# Altium PCB AC_board.PcbDoc (part 3 of 3)
Units mil, origin at the board's own origin, x right, y up, seen from the top; angles counter-clockwise.
Board outline 5905.51 x 3937.01 mil, 4 copper layers (Top Layer, Layer 1, Layer 2, Bottom Layer), stack 31.891 mil thick; 28 components, 29 nets, 132 pads, 3623 vias.
Unrouted connection lines stored in the file: 10.
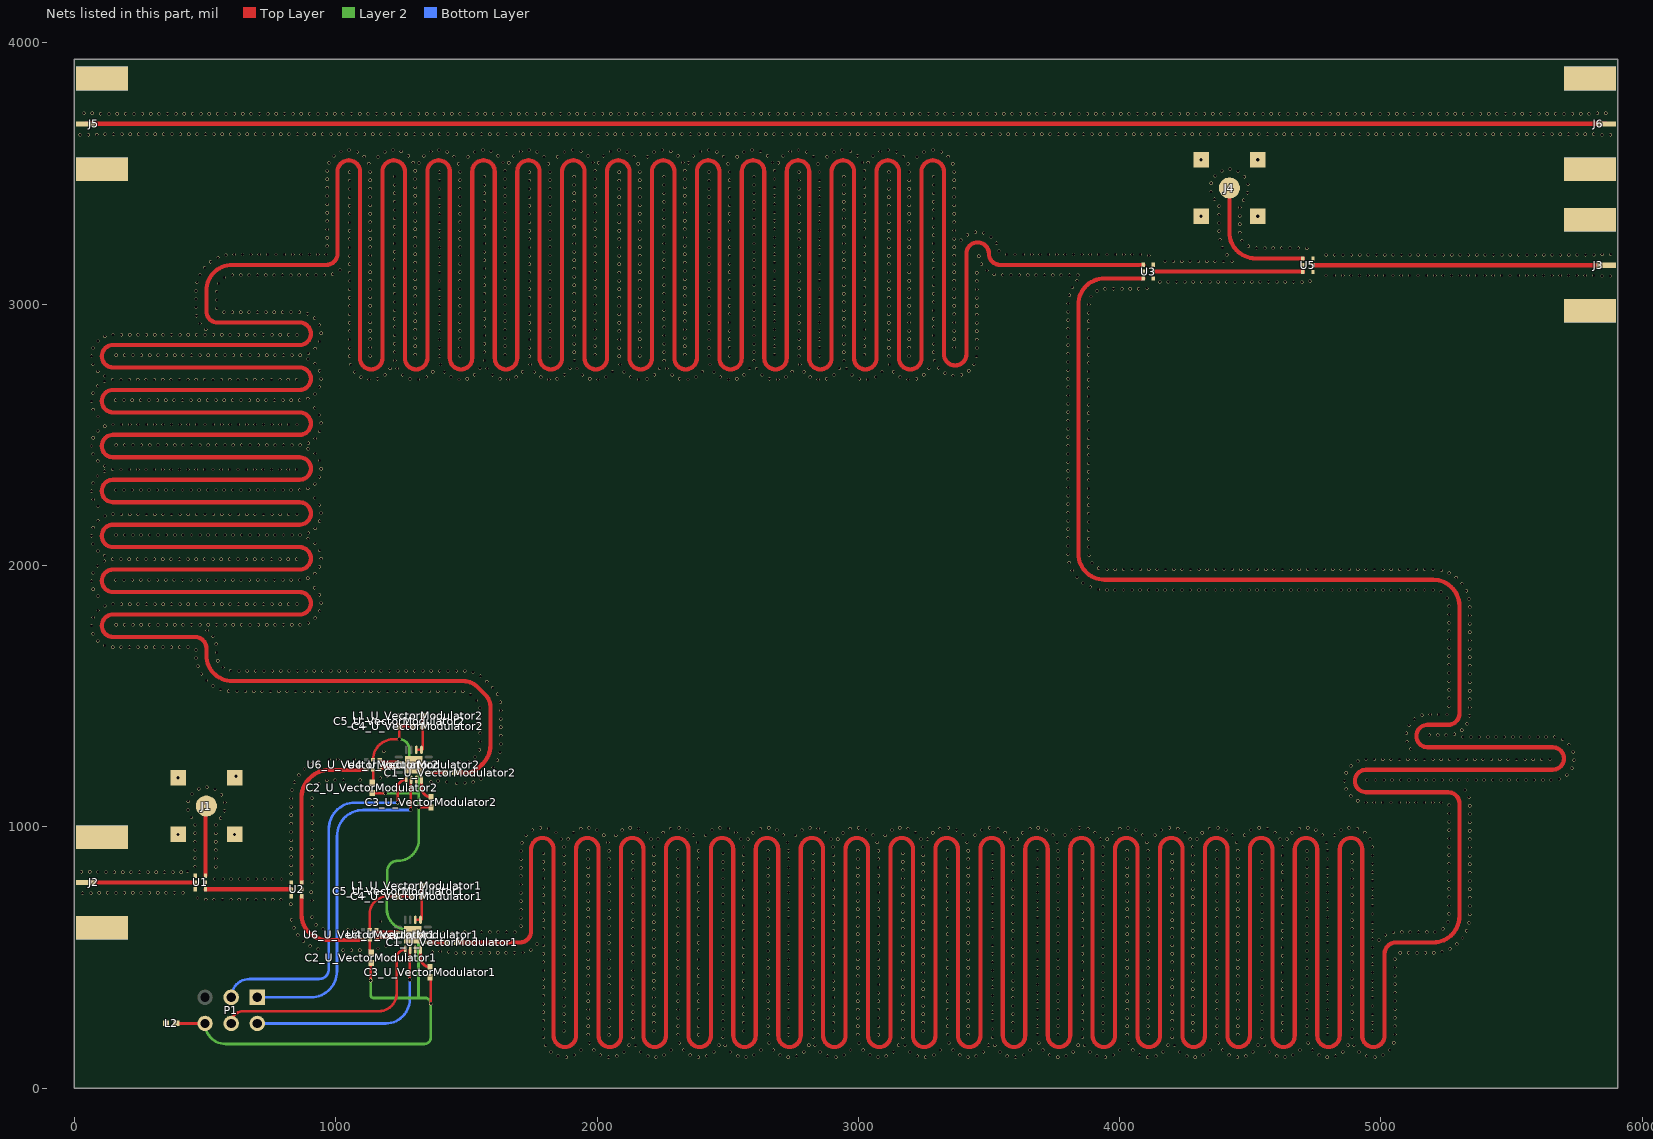
[diagram p5: the nets of this part, all layers, seen from the top]

## Via types
v1: diameter 12, hole 10, Top Layer to Bottom Layer, 3602 vias
v2: diameter 14, hole 12, Top Layer to Bottom Layer, 11 vias
v3: diameter 15, hole 12, Top Layer to Bottom Layer, 10 vias

## Nets (pads, with @x,y where several pads share a name; then routed paths per layer and width w, separated by ;. In a path a pad name is that pad's centre, name@x,y a point inside that pad or via, vN(x,y) a via of type N, cw(c..) or ccw(c..) an arc to the next point about the centre after c; other vN are vias at no path point) (continued)
AGND: (continued)
  other v1: 1277.98,3568.36 1337,3567.81 1621.73,3568.4 1680.82,3567.84 1965.48,3568.44 2024.66,3567.89 2309.22,3568.49 2368.49,3567.93 2712.33,3567.98 3056.18,3568.03 2652.97,3568.54 2996.71,3568.59 1083,3583.3 1187.99,3582.99 1426.83,3583.28 1531.74,3582.97 1770.67,3583.26 1875.47,3582.95 2114.52,3583.24 2219.21,3582.92 2458.37,3583.21 2562.94,3582.9 2802.22,3583.19 2906.66,3582.87 3146.08,3583.16 3250.39,3582.84 3317.78,3583.24 1020.31,3584.73 1250.67,3585.05 1364.14,3584.75 1594.41,3585.07 1707.98,3584.77 1938.15,3585.09 2051.82,3584.79 2281.88,3585.11 2395.68,3584.82 2625.61,3585.14 2739.53,3584.84 2969.34,3585.17 3083.39,3584.87 1051.8,3590.42 1219.12,3590.4 1395.64,3590.41 1562.86,3590.4 1739.48,3590.4 1906.59,3590.4 2083.33,3590.4 2250.32,3590.4 2427.19,3590.4 2594.05,3590.4 2771.04,3590.4 2937.77,3590.4 3114.91,3590.4 3286.59,3590.4 21.76,3648.73 53.76,3648.73 85.76,3649.36 5845.68,3648.73 5877.68,3648.73 117.73,3650.6 149.73,3650.6 181.73,3650.6 213.73,3650.6 245.73,3650.6 277.73,3650.6 309.73,3650.6 341.73,3650.6 373.73,3650.6 405.73,3650.6 437.73,3650.6 469.73,3650.6 501.73,3650.6 533.73,3650.6 565.73,3650.6 597.73,3650.6 629.73,3650.6 661.73,3650.6 693.73,3650.6 725.73,3650.6 757.73,3650.6 789.73,3650.6 821.73,3650.6 853.73,3650.6 885.73,3650.6 917.73,3650.6 949.73,3650.6 981.73,3650.6 1013.73,3650.6 1045.73,3650.6 1077.73,3650.6 1109.73,3650.6 1141.73,3650.6 1173.73,3650.6 1205.73,3650.6 1237.73,3650.6 1269.73,3650.6 1301.73,3650.6 1333.73,3650.6 1365.73,3650.6 1397.73,3650.6 1429.73,3650.6 1461.73,3650.6 1493.73,3650.6 1525.73,3650.6 1557.73,3650.6 1589.73,3650.6 1621.73,3650.6 1653.73,3650.6 1685.73,3650.6 1717.73,3650.6 1749.73,3650.6 1781.73,3650.6 1813.73,3650.6 1845.73,3650.6 1877.73,3650.6 1909.73,3650.6 1941.73,3650.6 1973.73,3650.6 2005.73,3650.6 2037.73,3650.6 2069.73,3650.6 2101.73,3650.6 2133.73,3650.6 2165.73,3650.6 2197.73,3650.6 2229.73,3650.6 2261.73,3650.6 2293.73,3650.6 2325.73,3650.6 2357.73,3650.6 2389.73,3650.6 2421.73,3650.6 2453.73,3650.6 2485.73,3650.6 2517.73,3650.6 2549.73,3650.6 2581.73,3650.6 2613.73,3650.6 2645.73,3650.6 2677.73,3650.6 2709.73,3650.6 2741.73,3650.6 2773.73,3650.6 2805.73,3650.6 2837.73,3650.6 2869.73,3650.6 2901.73,3650.6 2933.73,3650.6 2965.73,3650.6 2997.73,3650.6 3029.73,3650.6 3061.73,3650.6 3093.73,3650.6 3125.73,3650.6 3157.73,3650.6 3189.73,3650.6 3221.73,3650.6 3253.73,3650.6 3285.73,3650.6 3317.73,3650.6 3349.73,3650.6 3381.73,3650.6 3413.73,3650.6 3445.73,3650.6 3477.73,3650.6 3509.73,3650.6 3541.73,3650.6 3573.73,3650.6 3605.73,3650.6 3637.73,3650.6 3669.73,3650.6 3701.73,3650.6 3733.73,3650.6 3765.73,3650.6 3797.73,3650.6 3829.73,3650.6 3861.73,3650.6 3893.73,3650.6 3925.73,3650.6 3957.73,3650.6 3989.73,3650.6 4021.73,3650.6 4053.73,3650.6 4085.73,3650.6 4117.73,3650.6 4149.73,3650.6 4181.73,3650.6 4213.73,3650.6 4245.73,3650.6 4277.73,3650.6 4309.73,3650.6 4341.73,3650.6 4373.73,3650.6 4405.73,3650.6 4437.73,3650.6 4469.73,3650.6 4501.73,3650.6 4533.73,3650.6 4565.73,3650.6 4597.73,3650.6 4629.73,3650.6 4661.73,3650.6 4693.73,3650.6 4725.73,3650.6 4757.73,3650.6 4789.73,3650.6 4821.73,3650.6 4853.73,3650.6 4885.73,3650.6 4917.73,3650.6 4949.73,3650.6 4981.73,3650.6 5013.73,3650.6 5045.73,3650.6 5077.73,3650.6 5109.73,3650.6 5141.73,3650.6 5173.73,3650.6 5205.73,3650.6 5237.73,3650.6 5269.73,3650.6 5301.73,3650.6 5333.73,3650.6 5365.73,3650.6 5397.73,3650.6 5429.73,3650.6 5461.73,3650.6 5493.73,3650.6 5525.73,3650.6 5557.73,3650.6 5589.73,3650.6 5621.73,3650.6 5653.73,3650.6 5685.73,3650.6 5717.73,3650.6 5749.73,3650.6 5781.73,3650.6 5813.73,3650.6 100.29,3729.4 132.29,3729.4 164.29,3729.4 196.29,3729.4 228.29,3729.4 260.29,3729.4 292.29,3729.4 324.29,3729.4 356.29,3729.4 388.29,3729.4 420.29,3729.4 452.29,3729.4 484.29,3729.4 516.29,3729.4 548.29,3729.4 580.29,3729.4 612.29,3729.4 644.29,3729.4 676.29,3729.4 708.29,3729.4 740.29,3729.4 772.29,3729.4 804.29,3729.4 836.29,3729.4 868.29,3729.4 900.29,3729.4 932.29,3729.4 964.29,3729.4 996.29,3729.4 1028.29,3729.4 1060.29,3729.4 1092.29,3729.4 1124.29,3729.4 1156.29,3729.4 1188.29,3729.4 1220.29,3729.4 1252.29,3729.4 1284.29,3729.4 1316.29,3729.4 1348.29,3729.4 1380.29,3729.4 1412.29,3729.4 1444.29,3729.4 1476.29,3729.4 1508.29,3729.4 1540.29,3729.4 1572.29,3729.4 1604.29,3729.4 1636.29,3729.4 1668.29,3729.4 1700.29,3729.4 1732.29,3729.4 1764.29,3729.4 1796.29,3729.4 1828.29,3729.4 1860.29,3729.4 1892.29,3729.4 1924.29,3729.4 1956.29,3729.4 1988.29,3729.4 2020.29,3729.4 2052.29,3729.4 2084.29,3729.4 2116.29,3729.4 2148.29,3729.4 2180.29,3729.4 2212.29,3729.4 2244.29,3729.4 2276.29,3729.4 2308.29,3729.4 2340.29,3729.4 2372.29,3729.4 2404.29,3729.4 2436.29,3729.4 2468.29,3729.4 2500.29,3729.4 2532.29,3729.4 2564.29,3729.4 2596.29,3729.4 2628.29,3729.4 2660.29,3729.4 2692.29,3729.4 2724.29,3729.4 2756.29,3729.4 2788.29,3729.4 2820.29,3729.4 2852.29,3729.4 2884.29,3729.4 2916.29,3729.4 2948.29,3729.4 2980.29,3729.4 3012.29,3729.4 3044.29,3729.4 3076.29,3729.4 3108.29,3729.4 3140.29,3729.4 3172.29,3729.4 3204.29,3729.4 3236.29,3729.4 3268.29,3729.4 3300.29,3729.4 3332.29,3729.4 3364.29,3729.4 3396.29,3729.4 3428.29,3729.4 3460.29,3729.4 3492.29,3729.4 3524.29,3729.4 3556.29,3729.4 3588.29,3729.4 3620.29,3729.4 3652.29,3729.4 3684.29,3729.4 3716.29,3729.4 3748.29,3729.4 3780.29,3729.4 3812.29,3729.4 3844.29,3729.4 3876.29,3729.4 3908.29,3729.4 3940.29,3729.4 3972.29,3729.4 4004.29,3729.4 4036.29,3729.4 4068.29,3729.4 4100.29,3729.4 4132.29,3729.4 4164.29,3729.4 4196.29,3729.4 4228.29,3729.4 4260.29,3729.4 4292.29,3729.4 4324.29,3729.4 4356.29,3729.4 4388.29,3729.4 4420.29,3729.4 4452.29,3729.4 4484.29,3729.4 4516.29,3729.4 4548.29,3729.4 4580.29,3729.4 4612.29,3729.4 4644.29,3729.4 4676.29,3729.4 4708.29,3729.4 4740.29,3729.4 4772.29,3729.4 4804.29,3729.4 4836.29,3729.4 4868.29,3729.4 4900.29,3729.4 4932.29,3729.4 4964.29,3729.4 4996.29,3729.4 5028.29,3729.4 5060.29,3729.4 5092.29,3729.4 5124.29,3729.4 5156.29,3729.4 5188.29,3729.4 5220.29,3729.4 5252.29,3729.4 5284.29,3729.4 5316.29,3729.4 5348.29,3729.4 5380.29,3729.4 5412.29,3729.4 5444.29,3729.4 5476.29,3729.4 5508.29,3729.4 5540.29,3729.4 5572.29,3729.4 5604.29,3729.4 5636.29,3729.4 5668.29,3729.4 5700.29,3729.4 5732.29,3729.4 5764.29,3729.4 5796.29,3729.4 36.34,3731.27 68.34,3731.27 5828.23,3731.27 5860.23,3731.27
  other v3: 1295.16,587.4 396.73,971.73 613.27,971.73 396.73,1188.27 619,1194 1298.9,1237.91 4311.73,3336.73 4528.27,3336.73 4311.73,3553.27 4528.27,3553.27
B-IP: J2.SIG U1.2 | length 419.1
  Top Layer w15.95: J2.SIG@43.5,787.4 U1.2@462.6,787.4
B-OP: J3.SIG U5.2 | length 1122
  Top Layer w15.95: U5.2@4740,3149.61 J3.SIG@5862.01,3149.61
CoCap_U_VectorModulator1: C4_U_VectorModulator1.2 L1_U_VectorModulator1.2 U4_U_VectorModulator1.13 U4_U_VectorModulator1.14 | length 153.5
  Top Layer w10: U4_U_VectorModulator1.14@1305,644.68 U4_U_VectorModulator1.13@1324.69,644.68 ccw(c1324.69,649.94) 1329.94,649.94 C4_U_VectorModulator1.2@1329.94,734.49 L1_U_VectorModulator1.2@1329.94,775.49
CoCap_U_VectorModulator2: C4_U_VectorModulator2.2 L1_U_VectorModulator2.2 U4_U_VectorModulator2.13 U4_U_VectorModulator2.14 | length 153.5
  Top Layer w10: U4_U_VectorModulator2.14@1308.74,1295.2 U4_U_VectorModulator2.13@1328.43,1295.2 ccw(c1328.43,1300.46) 1333.69,1300.46 C4_U_VectorModulator2.2@1333.69,1385 L1_U_VectorModulator2.2@1333.69,1426
HMCIN_U_VectorModulator1: U4_U_VectorModulator1.3 U6_U_VectorModulator1.3 | length 87.6
  Top Layer w11.83: U6_U_VectorModulator1.3@1155.98,567.51 cw(c1166.03,567.51) 1166.03,577.56 U4_U_VectorModulator1.3@1237.87,577.56
HMCIN_U_VectorModulator2: U4_U_VectorModulator2.3 U6_U_VectorModulator2.3 | length 75.2
  Top Layer w11.83: U6_U_VectorModulator2.3@1168.98,1218.51 cw(c1192.06,1195.43) 1192.06,1228.07 U4_U_VectorModulator2.3@1241.61,1228.07
HMCINbar_U_VectorModulator1: U4_U_VectorModulator1.2 U6_U_VectorModulator1.4 | length 87.2
  Top Layer w11.83: U6_U_VectorModulator1.4@1155.98,606.49 ccw(c1165.23,606.49) 1165.23,597.24 U4_U_VectorModulator1.2@1237.87,597.24
HMCINbar_U_VectorModulator2: U4_U_VectorModulator2.2 U6_U_VectorModulator2.4 | length 75.2
  Top Layer w11.83: U6_U_VectorModulator2.4@1168.98,1257.49 ccw(c1192.48,1280.98) 1192.48,1247.76 U4_U_VectorModulator2.2@1241.61,1247.76
I1: P1.3 U4_U_VectorModulator2.5 | length 1398.8
  Top Layer w10: v2(1237,1093) 1237,1148.26 cw(c1269.37,1148.26) U4_U_VectorModulator2.5@1269.37,1180.63
  Bottom Layer w10: P1.3@600,348 cw(c670,348) 670,418 936,418 ccw(c936,456) 974,456 974,993 cw(c1074,993) 1074,1093 v2(1237,1093)
I2: P1.4 U4_U_VectorModulator1.5 | length 884.5
  Top Layer w10: P1.4@600,248 cw(c647,248) 647,295 1165.2,295 ccw(c1165.2,363.06) 1233.26,363.06 1233.26,497.75 cw(c1265.63,497.75) U4_U_VectorModulator1.5@1265.63,530.12
NetC1_U_VectorModulator1_1: C1_U_VectorModulator1.1 U4_U_VectorModulator1.9 | length 73.6
  Top Layer w15.95: U4_U_VectorModulator1.9@1352.44,557.87 1425.87,557.87 C1_U_VectorModulator1.1@1426,558
NetC1_U_VectorModulator2_1: C1_U_VectorModulator2.1 U4_U_VectorModulator2.9 | length 62.2
  Top Layer w10: U4_U_VectorModulator2.9@1356.18,1208.39 C1_U_VectorModulator2.1@1417.38,1208.39
  Top Layer w15.95: C1_U_VectorModulator2.1@1417.38,1208.39 cw(c1417.38,1207.07) C1_U_VectorModulator2.1@1418.32,1208
NetC2_U_VectorModulator1_2: C2_U_VectorModulator1.2 U6_U_VectorModulator1.2 | length 53.8
  Top Layer w10: U6_U_VectorModulator1.2@1130,567.51 1130,525.12 ccw(c1136.26,525.12) C2_U_VectorModulator1.2@1136.26,518.86 cw(c1136.26,519.84) C2_U_VectorModulator1.2@1135.28,519.84
NetC2_U_VectorModulator2_2: C2_U_VectorModulator2.2 U6_U_VectorModulator2.2 | length 49.2
  Top Layer w10: C2_U_VectorModulator2.2@1139.02,1170.35 ccw(c1129.4,1179.97) 1143,1179.97 U6_U_VectorModulator2.2@1143,1218.51
NetJ5_SIG: J5.SIG J6.SIG | length 5819.3
  Top Layer w15.95: J5.SIG@43.5,3690 44.41,3690.91 5861.1,3690.91 J6.SIG@5862.01,3690
Q1: P1.1 U4_U_VectorModulator2.6 | length 1334.5
  Top Layer w10: v2(1287,1066) 1287,1178.57 cw(c1289.06,1178.57) U4_U_VectorModulator2.6@1289.06,1180.63
  Bottom Layer w10: P1.1@700,348 905,348 ccw(c905,448) 1005,448 1005,965 cw(c1105,965) 1105,1065 1286,1065 ccw(c1286,1066) v2(1287,1066)
Q2: P1.2 U4_U_VectorModulator1.6 | length 828.5
  Top Layer w10: v2(1283.26,415.49) 1283.26,528.06 cw(c1285.32,528.06) U4_U_VectorModulator1.6@1285.32,530.12
  Bottom Layer w10: P1.2@700,248 1191,248 ccw(c1191,340.26) 1283.26,340.26 v2(1283.26,415.49) cw(c1282.26,415.49) v2@1282.26,414.49
RF-C1: U3.2 U5.6 | length 572.8
  Top Layer w15.95: U3.2@4128.98,3125 4699.65,3125 cw(c4699.65,3123.62) U5.6@4701.02,3123.62
RF-C1-1: C1_U_VectorModulator2.2 U3.4 | length 38646.8
  Top Layer w15.95: 605,3150.98 ccw(c605,3050.98) 505,3050.98 505,3033 505,3012 505,2973.19 ccw(c547.97,2973.19) 547.97,2930.22 862.03,2930.22 cw(c862.03,2887.24) 905,2887.24 cw(c862.03,2887.24) 862.03,2844.27 147.97,2844.27 ccw(c147.97,2801.29) 105,2801.29 ccw(c147.97,2801.29) 147.97,2758.32 862.03,2758.32 cw(c862.03,2715.35) 905,2715.35 cw(c862.03,2715.35) 862.03,2672.37 147.97,2672.37 ccw(c147.97,2629.4) 105,2629.4 ccw(c147.97,2629.4) 147.97,2586.43 862.03,2586.43 cw(c862.03,2543.45) 905,2543.45 cw(c862.03,2543.45) 862.03,2500.48 147.97,2500.48 ccw(c147.97,2457.5) 105,2457.5 ccw(c147.97,2457.5) 147.97,2414.53 862.03,2414.53 cw(c862.03,2371.56) 905,2371.56 cw(c862.03,2371.56) 862.03,2328.58 147.97,2328.58 ccw(c147.97,2285.61) 105,2285.61 ccw(c147.97,2285.61) 147.97,2242.63 862.03,2242.63 cw(c862.03,2199.66) 905,2199.66 cw(c862.03,2199.66) 862.03,2156.69 147.97,2156.69 ccw(c147.97,2113.71) 105,2113.71 ccw(c147.97,2113.71) 147.97,2070.74 862.03,2070.74 cw(c862.03,2027.77) 905,2027.77 cw(c862.03,2027.77) 862.03,1984.79 147.97,1984.79 ccw(c147.97,1941.82) 105,1941.82 ccw(c147.97,1941.82) 147.97,1898.84 862.03,1898.84 cw(c862.03,1855.87) 905,1855.87 cw(c862.03,1855.87) 862.03,1812.9 147.97,1812.9 ccw(c147.97,1769.92) 105,1769.92 ccw(c147.97,1769.92) 147.97,1726.95 462.03,1726.95 cw(c462.03,1683.97) 505,1683.97 505,1676 505,1658 ccw(c605,1658) 605,1558 1488.89,1558 cw(c1488.89,1482.89) 1542,1536 1573.62,1504.38 cw(c1529.23,1460) 1592,1460 1592,1312.42 cw(c1492,1312.42) 1562.71,1241.71 1549,1228 cw(c1500.72,1276.28) 1500.72,1208 C1_U_VectorModulator2.2@1457.69,1208 ; 611,3150.98 956,3150.98 963.97,3150.98 ccw(c963.97,3193.96) 1006.95,3193.96 1006.95,3508.01 cw(c1049.92,3508.01) 1049.92,3550.98 cw(c1049.92,3508.01) 1092.9,3508.01 1092.9,2793.96 ccw(c1135.87,2793.96) 1135.87,2750.98 ccw(c1135.87,2793.96) 1178.84,2793.96 1178.84,3508.01 cw(c1221.82,3508.01) 1221.82,3550.98 cw(c1221.82,3508.01) 1264.79,3508.01 1264.79,2793.96 ccw(c1307.77,2793.96) 1307.77,2750.98 ccw(c1307.77,2793.96) 1350.74,2793.96 1350.74,3508.01 cw(c1393.71,3508.01) 1393.71,3550.98 cw(c1393.71,3508.01) 1436.69,3508.01 1436.69,2793.96 ccw(c1479.66,2793.96) 1479.66,2750.98 ccw(c1479.66,2793.96) 1522.63,2793.96 1522.63,3508.01 cw(c1565.61,3508.01) 1565.61,3550.98 cw(c1565.61,3508.01) 1608.58,3508.01 1608.58,2793.96 ccw(c1651.56,2793.96) 1651.56,2750.98 ccw(c1651.56,2793.96) 1694.53,2793.96 1694.53,3508.01 cw(c1737.5,3508.01) 1737.5,3550.98 cw(c1737.5,3508.01) 1780.48,3508.01 1780.48,2793.96 ccw(c1823.45,2793.96) 1823.45,2750.98 ccw(c1823.45,2793.96) 1866.43,2793.96 1866.43,3508.01 cw(c1909.4,3508.01) 1909.4,3550.98 cw(c1909.4,3508.01) 1952.37,3508.01 1952.37,2793.96 ccw(c1995.35,2793.96) 1995.35,2750.98 ccw(c1995.35,2793.96) 2038.32,2793.96 2038.32,3508.01 cw(c2081.29,3508.01) 2081.29,3550.98 cw(c2081.29,3508.01) 2124.27,3508.01 2124.27,2793.96 ccw(c2167.24,2793.96) 2167.24,2750.98 ccw(c2167.24,2793.96) 2210.22,2793.96 2210.22,3508.01 cw(c2253.19,3508.01) 2253.19,3550.98 cw(c2253.19,3508.01) 2296.16,3508.01 2296.16,2793.96 ccw(c2339.14,2793.96) 2339.14,2750.98 ccw(c2339.14,2793.96) 2382.11,2793.96 2382.11,3508.01 cw(c2425.09,3508.01) 2425.09,3550.98 cw(c2425.09,3508.01) 2468.06,3508.01 2468.06,2793.96 ccw(c2511.03,2793.96) 2511.03,2750.98 ccw(c2511.03,2793.96) 2554.01,2793.96 2554.01,3508.01 cw(c2596.98,3508.01) 2596.98,3550.98 cw(c2596.98,3508.01) 2639.95,3508.01 2639.95,2793.96 ccw(c2682.93,2793.96) 2682.93,2750.98 ccw(c2682.93,2793.96) 2725.9,2793.96 2725.9,3508.01 cw(c2768.88,3508.01) 2768.88,3550.98 cw(c2768.88,3508.01) 2811.85,3508.01 2811.85,2793.96 ccw(c2854.82,2793.96) 2854.82,2750.98 ccw(c2854.82,2793.96) 2897.8,2793.96 2897.8,3508.01 cw(c2940.77,3508.01) 2940.77,3550.98 cw(c2940.77,3508.01) 2983.75,3508.01 2983.75,2793.96 ccw(c3026.72,2793.96) 3026.72,2750.98 ccw(c3026.72,2793.96) 3069.69,2793.96 3069.69,3508.01 cw(c3112.67,3508.01) 3112.67,3550.98 cw(c3112.67,3508.01) 3155.64,3508.01 3155.64,2793.96 ccw(c3198.61,2793.96) 3198.61,2750.98 ccw(c3198.61,2793.96) 3241.59,2793.96 3241.59,3508.01 cw(c3284.56,3508.01) 3284.56,3550.98 cw(c3284.56,3508.01) 3327.54,3508.01 3327.54,2809.12 ccw(c3370.51,2809.12) 3370.51,2766.15 ccw(c3370.51,2809.12) 3413.48,2809.12 3413.48,3193.96 cw(c3456.46,3193.96) 3456.46,3236.93 cw(c3456.46,3193.96) 3499.43,3193.96 ccw(c3542.41,3193.96) 3542.41,3150.98 3585.38,3150.98 3671.33,3150.98 3794,3150.98 U3.4@4090,3150.98
RF-C1-2: C1_U_VectorModulator1.2 U3.6 | length 38652.8
  Top Layer w15.95: C1_U_VectorModulator1.2@1465.37,558 1697,558 1704.97,558 ccw(c1704.97,600.97) 1747.95,600.97 1747.95,915.03 cw(c1790.92,915.03) 1790.92,958 cw(c1790.92,915.03) 1833.9,915.03 1833.9,200.97 ccw(c1876.87,200.97) 1876.87,158 ccw(c1876.87,200.97) 1919.84,200.97 1919.84,915.03 cw(c1962.82,915.03) 1962.82,958 cw(c1962.82,915.03) 2005.79,915.03 2005.79,200.97 ccw(c2048.77,200.97) 2048.77,158 ccw(c2048.77,200.97) 2091.74,200.97 2091.74,915.03 cw(c2134.71,915.03) 2134.71,958 cw(c2134.71,915.03) 2177.69,915.03 2177.69,200.97 ccw(c2220.66,200.97) 2220.66,158 ccw(c2220.66,200.97) 2263.63,200.97 2263.63,915.03 cw(c2306.61,915.03) 2306.61,958 cw(c2306.61,915.03) 2349.58,915.03 2349.58,200.97 ccw(c2392.56,200.97) 2392.56,158 ccw(c2392.56,200.97) 2435.53,200.97 2435.53,915.03 cw(c2478.5,915.03) 2478.5,958 cw(c2478.5,915.03) 2521.48,915.03 2521.48,200.97 ccw(c2564.45,200.97) 2564.45,158 ccw(c2564.45,200.97) 2607.43,200.97 2607.43,915.03 cw(c2650.4,915.03) 2650.4,958 cw(c2650.4,915.03) 2693.37,915.03 2693.37,200.97 ccw(c2736.35,200.97) 2736.35,158 ccw(c2736.35,200.97) 2779.32,200.97 2779.32,915.03 cw(c2822.29,915.03) 2822.29,958 cw(c2822.29,915.03) 2865.27,915.03 2865.27,200.97 ccw(c2908.24,200.97) 2908.24,158 ccw(c2908.24,200.97) 2951.22,200.97 2951.22,915.03 cw(c2994.19,915.03) 2994.19,958 cw(c2994.19,915.03) 3037.16,915.03 3037.16,200.97 ccw(c3080.14,200.97) 3080.14,158 ccw(c3080.14,200.97) 3123.11,200.97 3123.11,915.03 cw(c3166.09,915.03) 3166.09,958 cw(c3166.09,915.03) 3209.06,915.03 3209.06,200.97 ccw(c3252.03,200.97) 3252.03,158 ccw(c3252.03,200.97) 3295.01,200.97 3295.01,915.03 cw(c3337.98,915.03) 3337.98,958 cw(c3337.98,915.03) 3380.95,915.03 3380.95,200.97 ccw(c3423.93,200.97) 3423.93,158 ccw(c3423.93,200.97) 3466.9,200.97 3466.9,915.03 cw(c3509.88,915.03) 3509.88,958 cw(c3509.88,915.03) 3552.85,915.03 3552.85,200.97 ccw(c3595.82,200.97) 3595.82,158 ccw(c3595.82,200.97) 3638.8,200.97 3638.8,915.03 cw(c3681.77,915.03) 3681.77,958 cw(c3681.77,915.03) 3724.75,915.03 3724.75,200.97 ccw(c3767.72,200.97) 3767.72,158 ccw(c3767.72,200.97) 3810.69,200.97 3810.69,915.03 cw(c3853.67,915.03) 3853.67,958 cw(c3853.67,915.03) 3896.64,915.03 3896.64,200.97 ccw(c3939.61,200.97) 3939.61,158 ccw(c3939.61,200.97) 3982.59,200.97 3982.59,915.03 cw(c4025.56,915.03) 4025.56,958 cw(c4025.56,915.03) 4068.54,915.03 4068.54,200.97 ccw(c4111.51,200.97) 4111.51,158 ccw(c4111.51,200.97) 4154.48,200.97 4154.48,915.03 cw(c4197.46,915.03) 4197.46,958 cw(c4197.46,915.03) 4240.43,915.03 4240.43,200.97 ccw(c4283.41,200.97) 4283.41,158 ccw(c4283.41,200.97) 4326.38,200.97 4326.38,915.03 cw(c4369.35,915.03) 4369.35,958 cw(c4369.35,915.03) 4412.33,915.03 4412.33,200.97 ccw(c4455.3,200.97) 4455.3,158 ccw(c4455.3,200.97) 4498.27,200.97 4498.27,915.03 cw(c4541.25,915.03) 4541.25,958 cw(c4541.25,915.03) 4584.22,915.03 4584.22,200.97 ccw(c4627.2,200.97) 4627.2,158 ccw(c4627.2,200.97) 4670.17,200.97 4670.17,915.03 cw(c4713.14,915.03) 4713.14,958 cw(c4713.14,915.03) 4756.12,915.03 4756.12,200.97 ccw(c4799.09,200.97) 4799.09,158 ccw(c4799.09,200.97) 4842.07,200.97 4842.07,915.03 cw(c4885.04,915.03) 4885.04,958 cw(c4885.04,915.03) 4928.01,915.03 4928.01,200.97 ccw(c4970.99,200.97) 4970.99,158 ccw(c4970.99,200.97) 5013.96,200.97 5013.96,515.03 cw(c5056.93,515.03) 5056.93,558 5155,558 5200,558 ccw(c5200,658) 5300,658 5300,1082 5300,1089.97 ccw(c5257.03,1089.97) 5257.03,1132.95 4942.97,1132.95 cw(c4942.97,1175.92) 4900,1175.92 cw(c4942.97,1175.92) 4942.97,1218.9 5657.03,1218.9 ccw(c5657.03,1261.87) 5700,1261.87 ccw(c5657.03,1261.87) 5657.03,1304.84 5178.46,1304.84 cw(c5178.46,1347.82) 5135.48,1347.82 cw(c5178.46,1347.82) 5178.46,1390.79 5257.03,1390.79 ccw(c5257.03,1433.77) 5300,1433.77 5300,1476.74 5300,1562.69 5300,1700 5300,1846 ccw(c5200,1846) 5200,1946 3942,1946 cw(c3942,2046) 3842,2046 3842,2999.02 cw(c3942,2999.02) 3942,3099.02 U3.6@4090,3099.02
RF-S1: U1.4 U2.2 | length 329.6
  Top Layer w13.64: U2.2@830.19,761.42 830.51,761.09 U2.2@830.51,761
  Top Layer w15.29: U1.4@501.57,761 U1.4@501.57,761.42
  Top Layer w15.95: U1.4@501.57,761.42 U2.2@830.19,761.42
RF-S2-1: U2.6 U6_U_VectorModulator2.1 | length 633.4
  Top Layer w15.95: U2.6@869.49,786.98 869.49,1114.68 cw(c966.95,1114.68) 897.22,1182.78 903.67,1189.22 cw(c974.38,1118.51) 974.38,1218.51 U6_U_VectorModulator2.1@1117.02,1218.51
RF-S2-2: U2.4 U6_U_VectorModulator1.1 | length 360.5
  Top Layer w15.95: U2.4@869.49,735.02 869.49,664.17 ccw(c966.15,664.17) 966.15,567.51 U6_U_VectorModulator1.1@1104.02,567.51
RXin: J4.C U5.4 | length 507.5
  Top Layer w15.95: J4.C@4420,3445 4420,3275.59 ccw(c4520,3275.59) 4520,3175.59 U5.4@4701.02,3175.59
TXout: J1.C U1.6 | length 268.6
  Top Layer w15.95: U1.6@501.57,813.39 501.57,1076.57 cw(c505,1076.57) J1.C@505,1080
VCC-IN1_U_VectorModulator1: C3_U_VectorModulator1.2 U4_U_VectorModulator1.7 U4_U_VectorModulator1.8 | length 97.1
  Top Layer w10: U4_U_VectorModulator1.7@1305,520.12 U4_U_VectorModulator1.7@1305,530.12 ; U4_U_VectorModulator1.8@1324.69,530.12 1324.69,500.43 ccw(c1361.26,500.43) C3_U_VectorModulator1.2@1361.26,463.86
VCC-IN1_U_VectorModulator2: C3_U_VectorModulator2.2 U4_U_VectorModulator2.7 U4_U_VectorModulator2.8 | length 97.1
  Top Layer w10: U4_U_VectorModulator2.7@1308.74,1170.63 U4_U_VectorModulator2.7@1308.74,1180.63 ; U4_U_VectorModulator2.8@1328.43,1180.63 1328.43,1150.94 ccw(c1365,1150.94) C3_U_VectorModulator2.2@1365,1114.37
pads on no net: U4_U_VectorModulator1.1 U4_U_VectorModulator1.4 U4_U_VectorModulator1.10 U4_U_VectorModulator1.11 U4_U_VectorModulator1.12 U4_U_VectorModulator1.15 U4_U_VectorModulator1.16 U4_U_VectorModulator2.1 U4_U_VectorModulator2.4 U4_U_VectorModulator2.10 U4_U_VectorModulator2.11 U4_U_VectorModulator2.12 U4_U_VectorModulator2.15 U4_U_VectorModulator2.16 U6_U_VectorModulator1.6 U6_U_VectorModulator2.6

## Polygon pours and split planes (outlines as drawn)
AGND on Layer 1 "GND-2" (solid, shelved, pour order 4): 0,3937.01 5905.51,3937.01 5905.51,0 0,0
AGND on Layer 2 "GND-3" (solid, shelved, pour order 6): 0,3937.01 5905.51,3937.01 5905.51,0 0,0
AGND on Bottom Layer "GND-4" (solid, shelved, pour order 8): 0,3937.01 5905.51,3937.01 5905.51,0 0,0
AGND on Top Layer "GND-1" (solid, shelved, pour order 2): 0,3937.01 5905.51,3937.01 5905.51,0 0,0

## Silkscreen, mask and mechanical layers (free items; w line width, h text height)
Top Overlay:
  drawing of 588 lines, arcs and shapes, not listed
  text "CPWG [20mils Iso] 15.948 mils" at 2352.76,3738.01 h40
  text "1300.3 deg (24911.288 mils)" at 1530,2537.56 h40
  text "AC board / Rev 1" at 1961.84,1576.61 h40
  text "3250.8 deg (38652.770mils)" at 2812.16,1033.34 h40
  text "8V /  /  / I-1 /  /  / Q-1" at 735,408.46 h20 r90
  text "AGND /  /  / I-2 /  /  / Q-2" at 735,105.32 h20 r90
Top Solder:
  lines w11.83: 1155.98,567.51 cw(c1166.03,567.51) 1166.03,577.56 1237.87,577.56 ; 1155.98,606.49 ccw(c1165.23,606.49) 1165.23,597.24 1237.87,597.24 ; 1168.98,1218.51 cw(c1192.06,1195.43) 1192.06,1228.07 1241.61,1228.07 ; 1168.98,1257.49 ccw(c1192.48,1280.98) 1192.48,1247.76 1241.61,1247.76
  lines w15.95: 43.5,787.4 462.6,787.4 ; 43.5,3690 5862.01,3690 ; 501.57,761.42 830.19,761.42 ; 501.57,813.39 501.57,1076.57 ; 505.02,1656 ccw(c605,1658) 605,1558 1488.89,1558 cw(c1488.89,1482.89) 1542,1536 1573.62,1504.38 cw(c1529.23,1460) 1592,1460 1592,1312.42 cw(c1492,1312.42) 1562.71,1241.71 1549,1228 cw(c1500.72,1276.28) 1500.72,1208 1457.69,1208 ; 505,3050.98 cw(c605,3050.98) 605,3150.98 ; 611,3150.98 964,3150.98 ; 869.49,735.02 869.49,664.17 ccw(c966.15,664.17) 966.15,567.51 1104.02,567.51 ; 869.49,786.98 869.49,1114.68 cw(c966.95,1114.68) 897.22,1182.78 ; 903.67,1189.22 cw(c974.38,1118.51) 974.38,1218.51 1117.02,1218.51 ; 1352.44,557.87 1425.87,557.87 ; 1356.18,1208.39 1417.38,1208.39 ; 1465.37,558 1697,558 ; 3561,3151 4090,3150.98 ; 4090,3099.02 3942,3099.02 ccw(c3942,2999.02) 3842,2999.02 3842,2046 ccw(c3942,2046) 3942,1946 4695,1946 5200,1946 cw(c5200,1846) 5300,1846 5300,1450 ; 4128.98,3125 4699.65,3125 ; 4420,3445 4420,3275.59 ccw(c4520,3275.59) 4520,3175.59 4701.02,3175.59 ; 4740,3149.61 5862.01,3149.61 ; 5200,558 ccw(c5200,658) 5300,658 5300,958
Board Outline:
  the board outline again, w10

## Text inside footprints (layer, text, board x,y; h text height)
P1: Top Overlay "6" at 440,268 h50 r180; Top Overlay "5" at 440,368 h50 r180; Top Overlay "2" at 800,268 h50 r180; Top Overlay "1" at 780,368 h50 r180